# EAGLE board sensor (EAGLE 9.6.1)
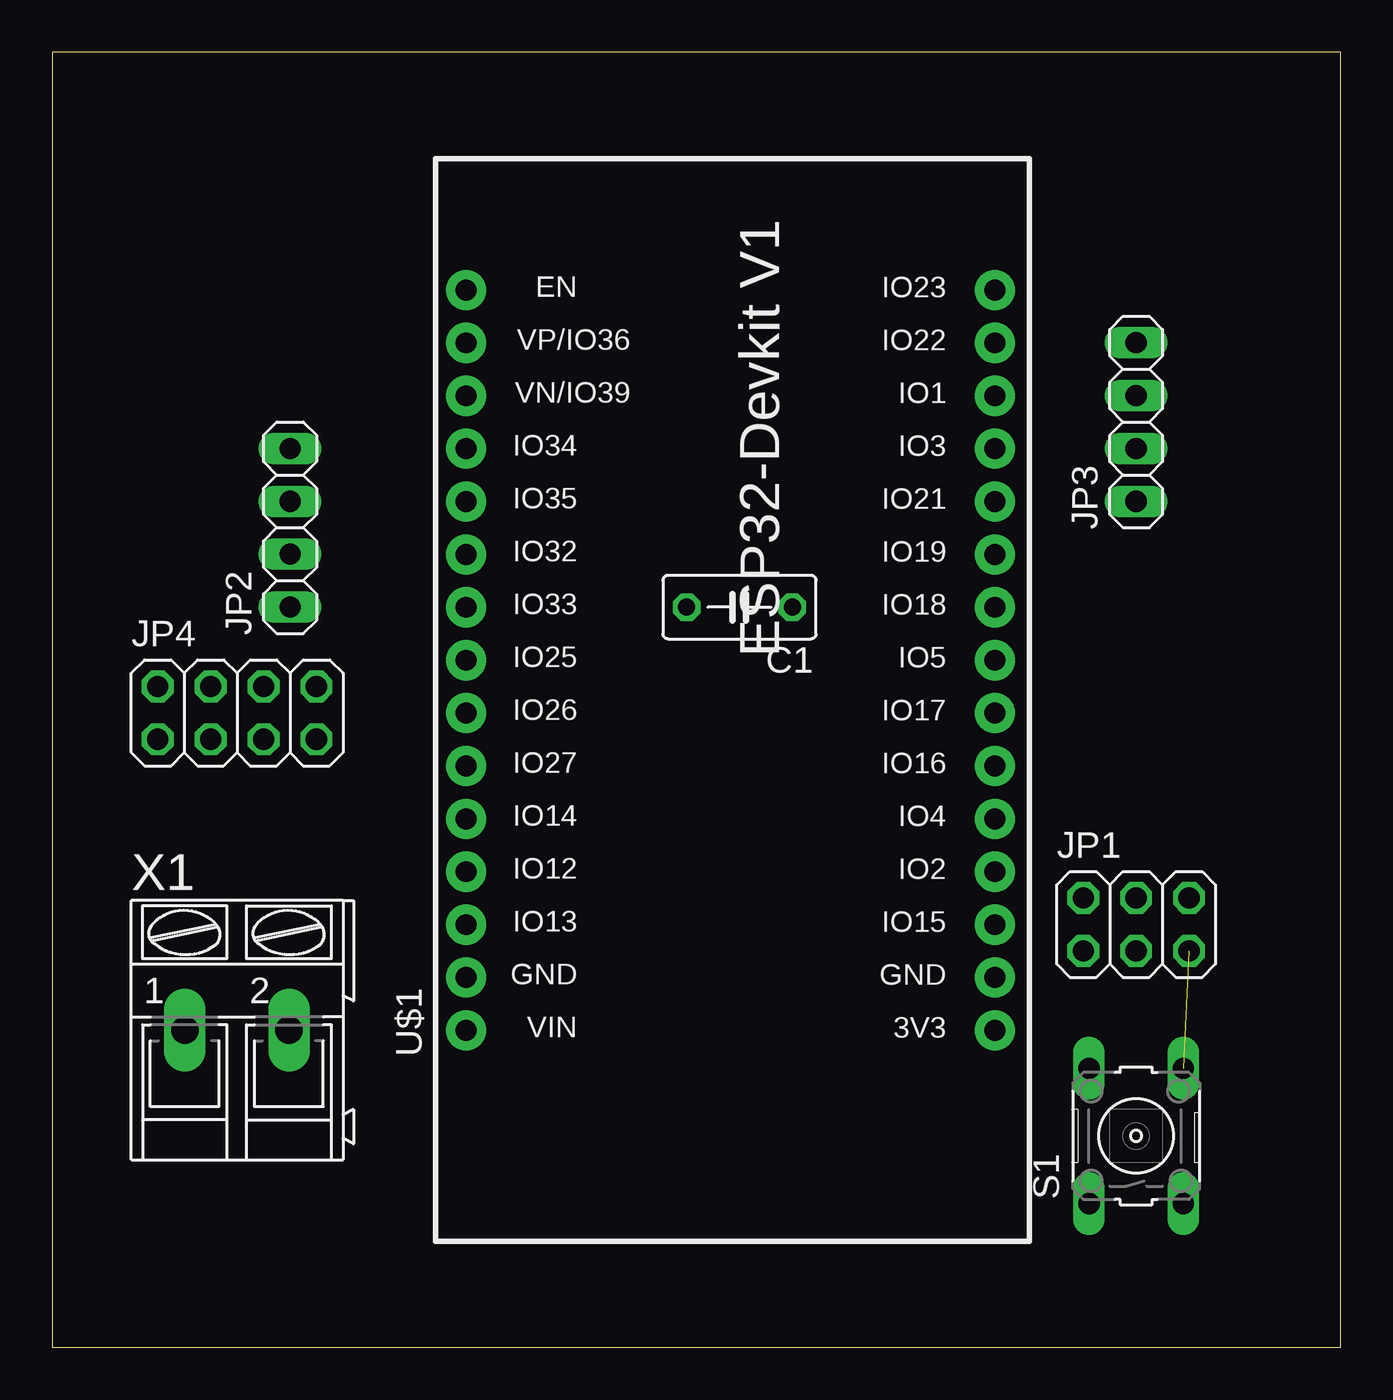
[diagram p0: board, top side]
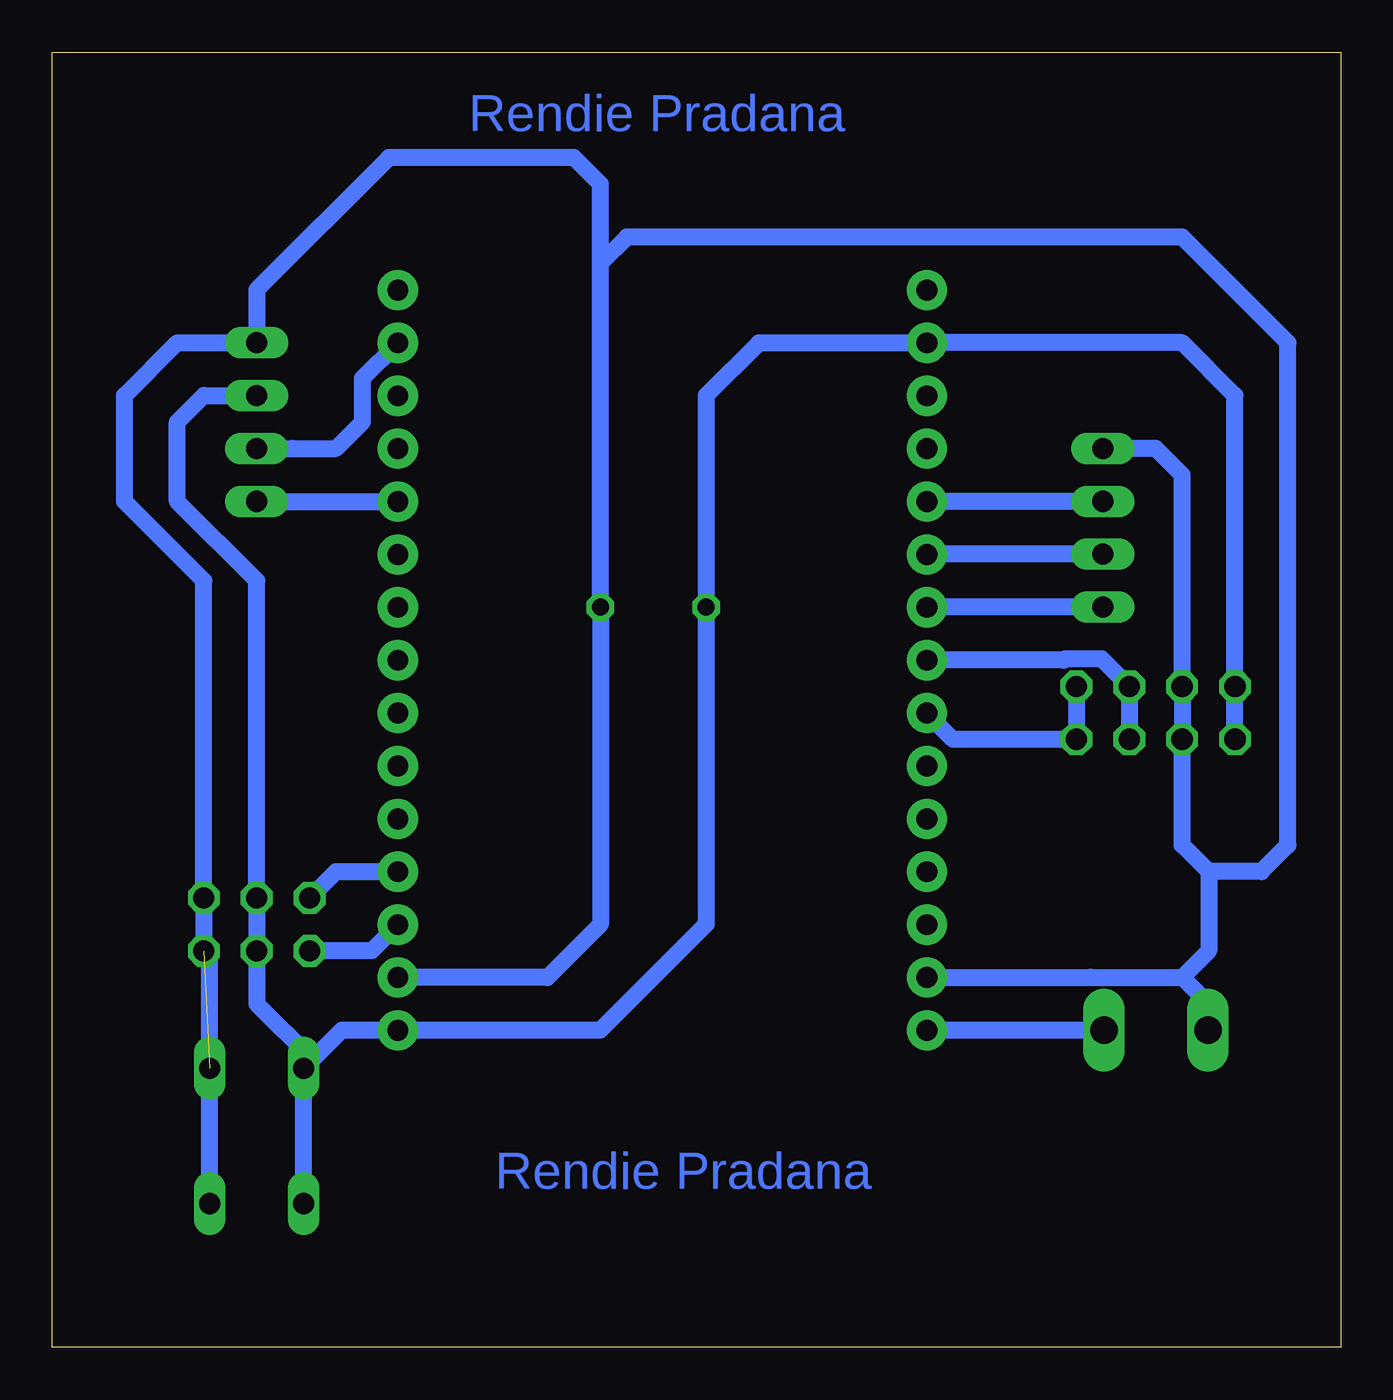
[diagram p1: board, bottom side, seen from below]

Size 61.9 x 62.22 mm. Coordinates in mm from the lower left corner, seen from the top.
Outline: 0,0 61.9,0 61.9,62.22 0,62.22 0,0
Copper layers (1*16): Top 0.035mm / dielectric 1.5mm / Bottom 0.035mm
Design rules "default": minimum track width 6mil, minimum drill 0.35mm, track to track 6mil, track to pad 6mil, pad to pad 6mil, via to via 6mil, smd to smd 6mil, copper to edge 40mil, drill to drill 6mil, minimum pad ring 10mil, minimum via ring 8mil, stop-mask expansion 4mil, vias tented up to drill 0mil, thermal gap 10mil

## Footprints (pad centres in the part's own frame; a part is rotated, then mirrored left to right if it is on the bottom)
C050-030X075 = drill 0.813 octagon: 1 -2.54,0; 2 2.54,0
2X03 = drill 1.016 octagon: 1 -2.54,-1.27; 2 -2.54,1.27; 3 0,-1.27; 4 0,1.27; 5 2.54,-1.27; 6 2.54,1.27
1X04 = drill 1.016 long: 1 -3.81,0; 2 -1.27,0; 3 1.27,0; 4 3.81,0
2X04 = drill 1.016 octagon: 1 -3.81,-1.27; 2 -3.81,1.27; 3 -1.27,-1.27; 4 -1.27,1.27; 5 1.27,-1.27; 6 1.27,1.27; 7 3.81,-1.27; 8 3.81,1.27
B3F-10XX = drill 1.016 long: 1 -3.251,2.261; 2 3.251,2.261; 3 -3.251,-2.261; 4 3.251,-2.261
ESP32-DEVKITV1 = drill 1 pad 1.93: 3V3 -16.52,-12.27; D1 13.96,-12.27; D2 -8.9,-12.27; D3 11.42,-12.27; D4 -6.36,-12.27; D5 1.26,-12.27; D12 -8.9,13.135; D13 -11.44,13.135; D14 -6.36,13.135; D15 -11.44,-12.27; D16 -3.82,-12.27; D17 -1.28,-12.27; D18 3.8,-12.27; D19 6.34,-12.27; D21 8.88,-12.27; D22 16.5,-12.27; D23 19.04,-12.27; D25 1.26,13.135; D26 -1.28,13.135; D27 -3.82,13.135; D32 6.34,13.135; D33 3.8,13.135; D34 11.42,13.135; D35 8.88,13.135; D36 16.5,13.135; D39 13.96,13.135; EN 19.04,13.135; GND@1 -13.98,13.135; GND@2 -13.98,-12.27; VIN -16.52,13.135
AK300/2 = drill 1.321 long: 1 -2.515,0; 2 2.489,0

## Placement (x,y rotation side)
C1  [C050-030X075]  33.02,35.56 180 top
JP1  [2X03]  52.07,20.32 0 top
JP2  [1X04]  11.43,39.37 90 top
JP3  [1X04]  52.07,44.45 90 top
JP4  [2X04]  8.89,30.48 0 top
S1  [B3F-10XX]  52.07,10.16 90 top
U$1  ESP32DEVKITV1  [ESP32-DEVKITV1]  33.02,31.75 90 top
X1  [AK300/2]  8.89,15.24 0 top

## Library data of the parts
C1 = rcl; SPICEPREFIX: C
JP1-JP4 = pinhead
S1 = switch-omron; MPN: B3F-1000; OC_FARNELL: 176432; OC_NEWARK: 36M3542
U$1 = esp32-devkitv1
X1 = con-ptr500; OC_FARNELL: unknown; OC_NEWARK: unknown

## Nets
GND: C1.1 JP1.5 JP1.6 JP2.4 JP3.4 JP4.3 JP4.4 S1.3 S1.4 U$1.GND@1 U$1.GND@2 X1.1
MOISTURE: JP1.2 U$1.D2
OUT1: JP2.1 U$1.D33
OUT2: JP2.2 U$1.D32
OUT3: JP2.3 U$1.D35
PH: JP1.1 U$1.D15
SCL: JP3.2 U$1.D22
SCL2: JP4.5 JP4.6 U$1.D25
SDA: JP3.1 U$1.D21
SDA2: JP4.7 JP4.8 U$1.D26
V: C1.2 JP1.3 JP1.4 JP3.3 JP4.1 JP4.2 S1.1 S1.2 U$1.3V3 U$1.D36
VIN: U$1.VIN X1.2

## Tracks (layer width: path | path; a pad name or v marks a point on that pad's centre or on a via)
GND  (1 unrouted)
  Bottom 0.813: 6.35,22.86 3.81,22.86 2.54,24.13 2.54,48.26 7.62,53.34 34.29,53.34 35.56,52.07 | 6.35,22.86 7.62,24.13 JP4.3 JP4.4 7.62,41.91 8.89,43.18 JP2.4 | U$1.GND@1 12.03,17.77 12.02,17.78 7.62,17.78 | 7.62,17.78 6.35,16.51 6.35,15.26 X1.1 | U$1.GND@2 38.11,17.77 35.56,20.32 C1.1 35.56,52.07 | S1.3 54.33,18.77 JP1.5 JP1.6 54.61,36.83 58.42,40.64 58.42,45.72 55.88,48.26 JP3.4 52.07,50.8 45.72,57.15 36.83,57.15 35.56,55.88 35.56,52.07 | 6.35,22.86 6.35,19.05 7.62,17.78
MOISTURE
  Bottom 0.813: U$1.D2 48.27,22.85 JP1.2
OUT1
  Bottom 0.813: JP2.1 19.87,35.56 U$1.D33
OUT2
  Bottom 0.813: JP2.2 19.87,38.1 U$1.D32
OUT3
  Bottom 0.813: JP2.3 19.87,40.64 U$1.D35
PH
  Bottom 0.813: U$1.D15 46.55,19.05 JP1.1
SCL
  Bottom 0.813: JP3.2 50.8,43.18 50.36,43.18 48.26,43.18 46.99,44.45 46.99,46.55 U$1.D22
SCL2
  Bottom 0.813: JP4.5 JP4.6 11.48,33.07 13.25,33.07 13.31,33.01 U$1.D25
SDA
  Bottom 0.813: JP3.1 U$1.D21
SDA2
  Bottom 0.813: JP4.8 JP4.7 18.62,29.21 U$1.D26
V
  Bottom 0.813: JP4.1 JP4.2 5.08,45.72 7.62,48.26 19.87,48.26 U$1.D36 27.95,48.25 30.48,45.72 C1.2 30.48,20.32 35.57,15.23 U$1.3V3 47.99,15.23 49.39,13.83 | 49.39,13.83 S1.2 S1.1 | JP3.3 54.61,45.72 55.88,44.45 55.88,40.64 52.07,36.83 JP1.4 JP1.3 52.07,16.51 49.39,13.83
VIN
  Bottom 0.813: X1.2 19.87,15.24 U$1.VIN

## Text on the board
Bottom: Rendie Pradana | Rendie Pradana